# Altium PCB powermodule.PcbDoc
Units mm, origin at the board's own origin, x right, y up, seen from the top; angles counter-clockwise.
Board outline 100 x 100 mm, 2 copper layers (Top Layer, Bottom Layer); 59 components, 39 nets, 203 pads, 39 vias.
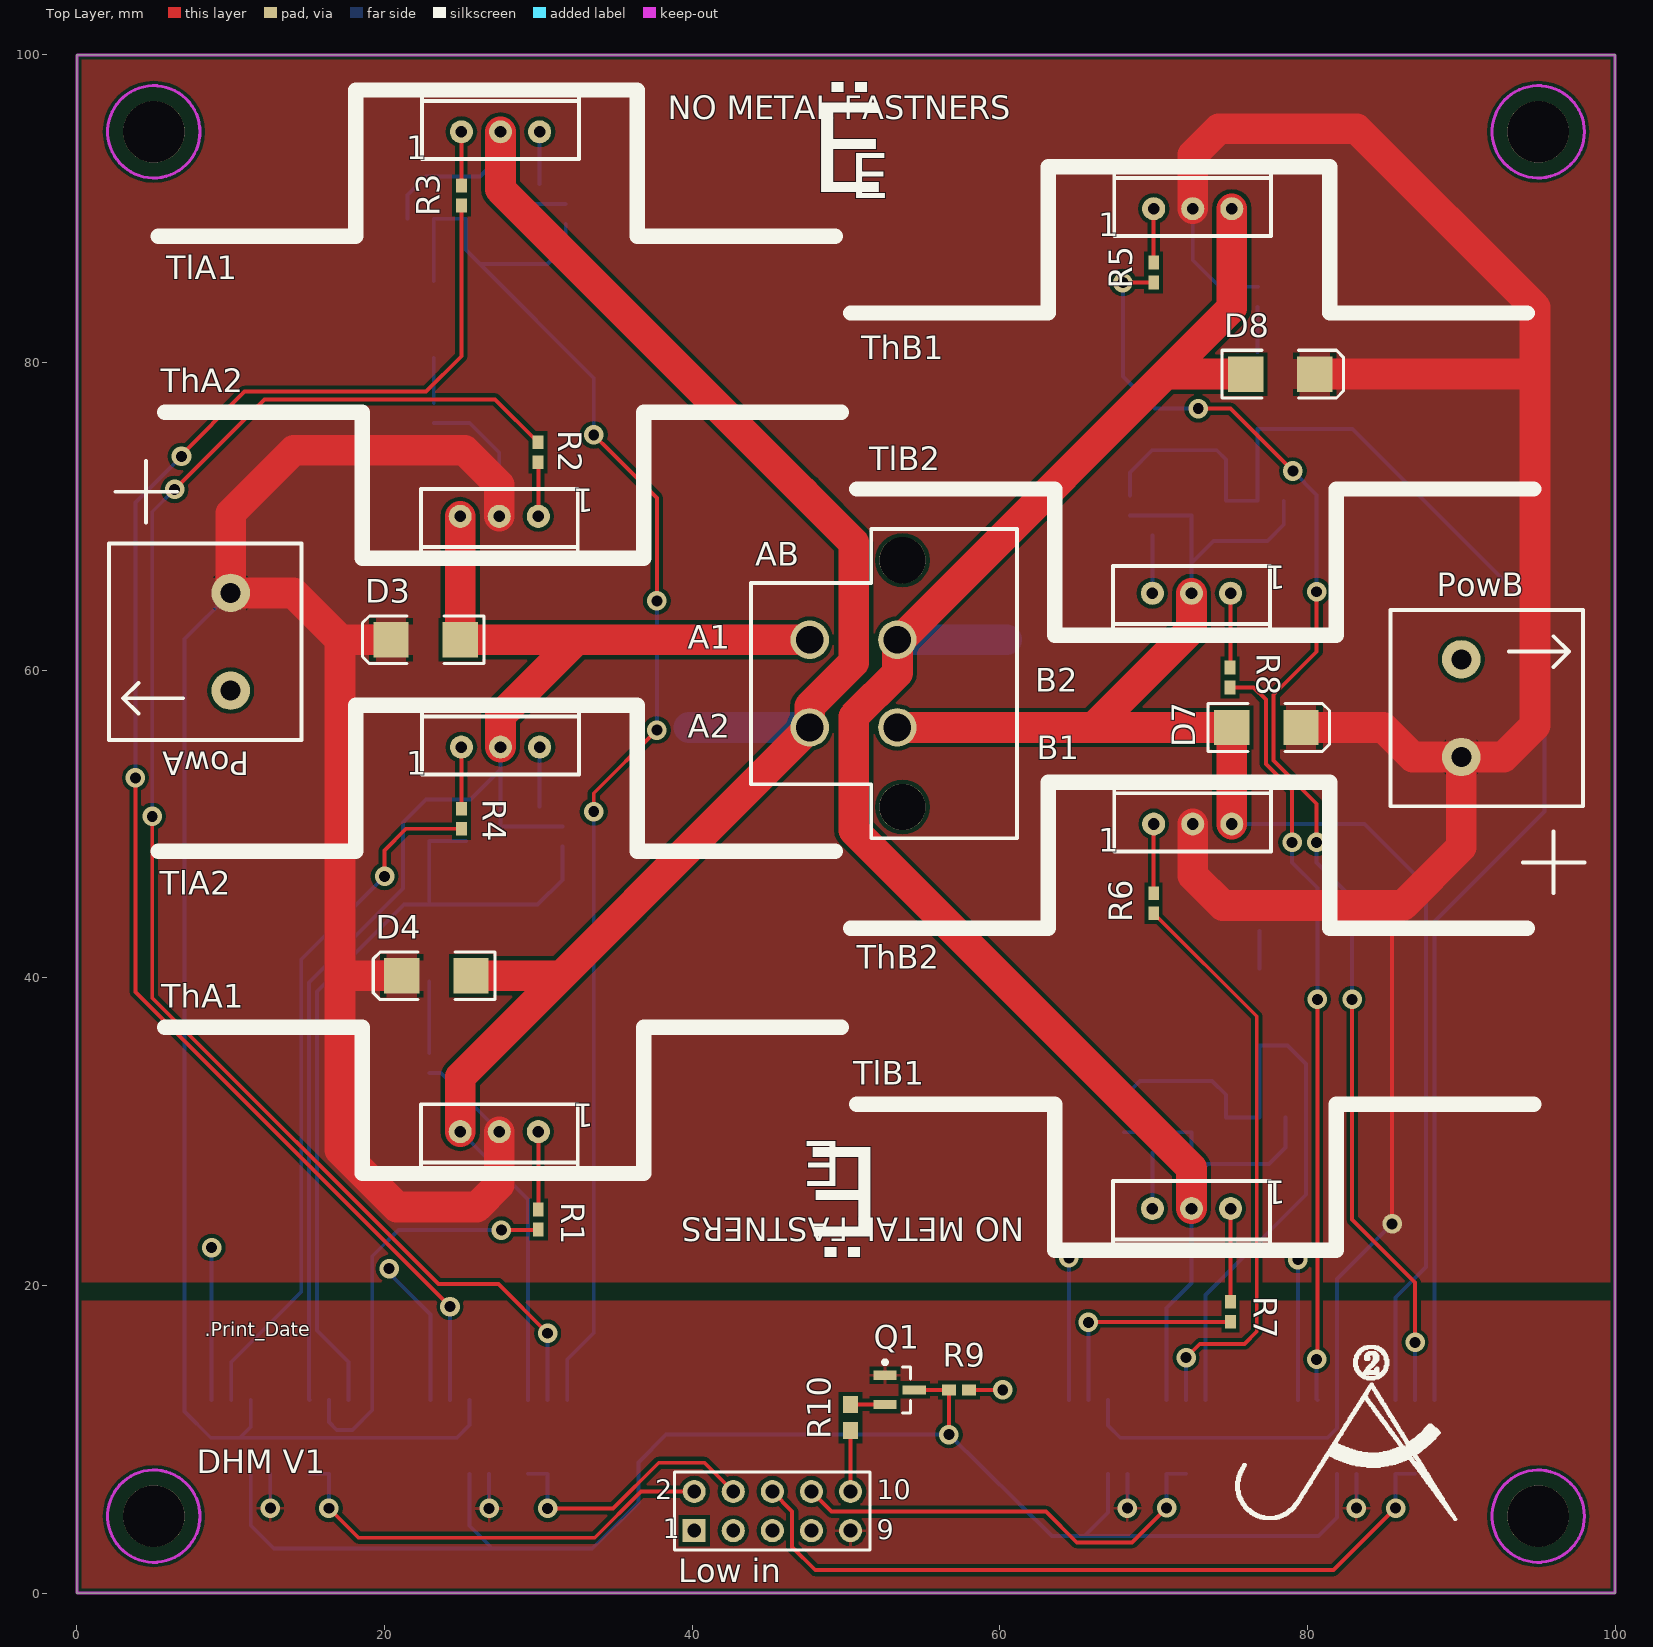
[diagram p0: Top Layer view]
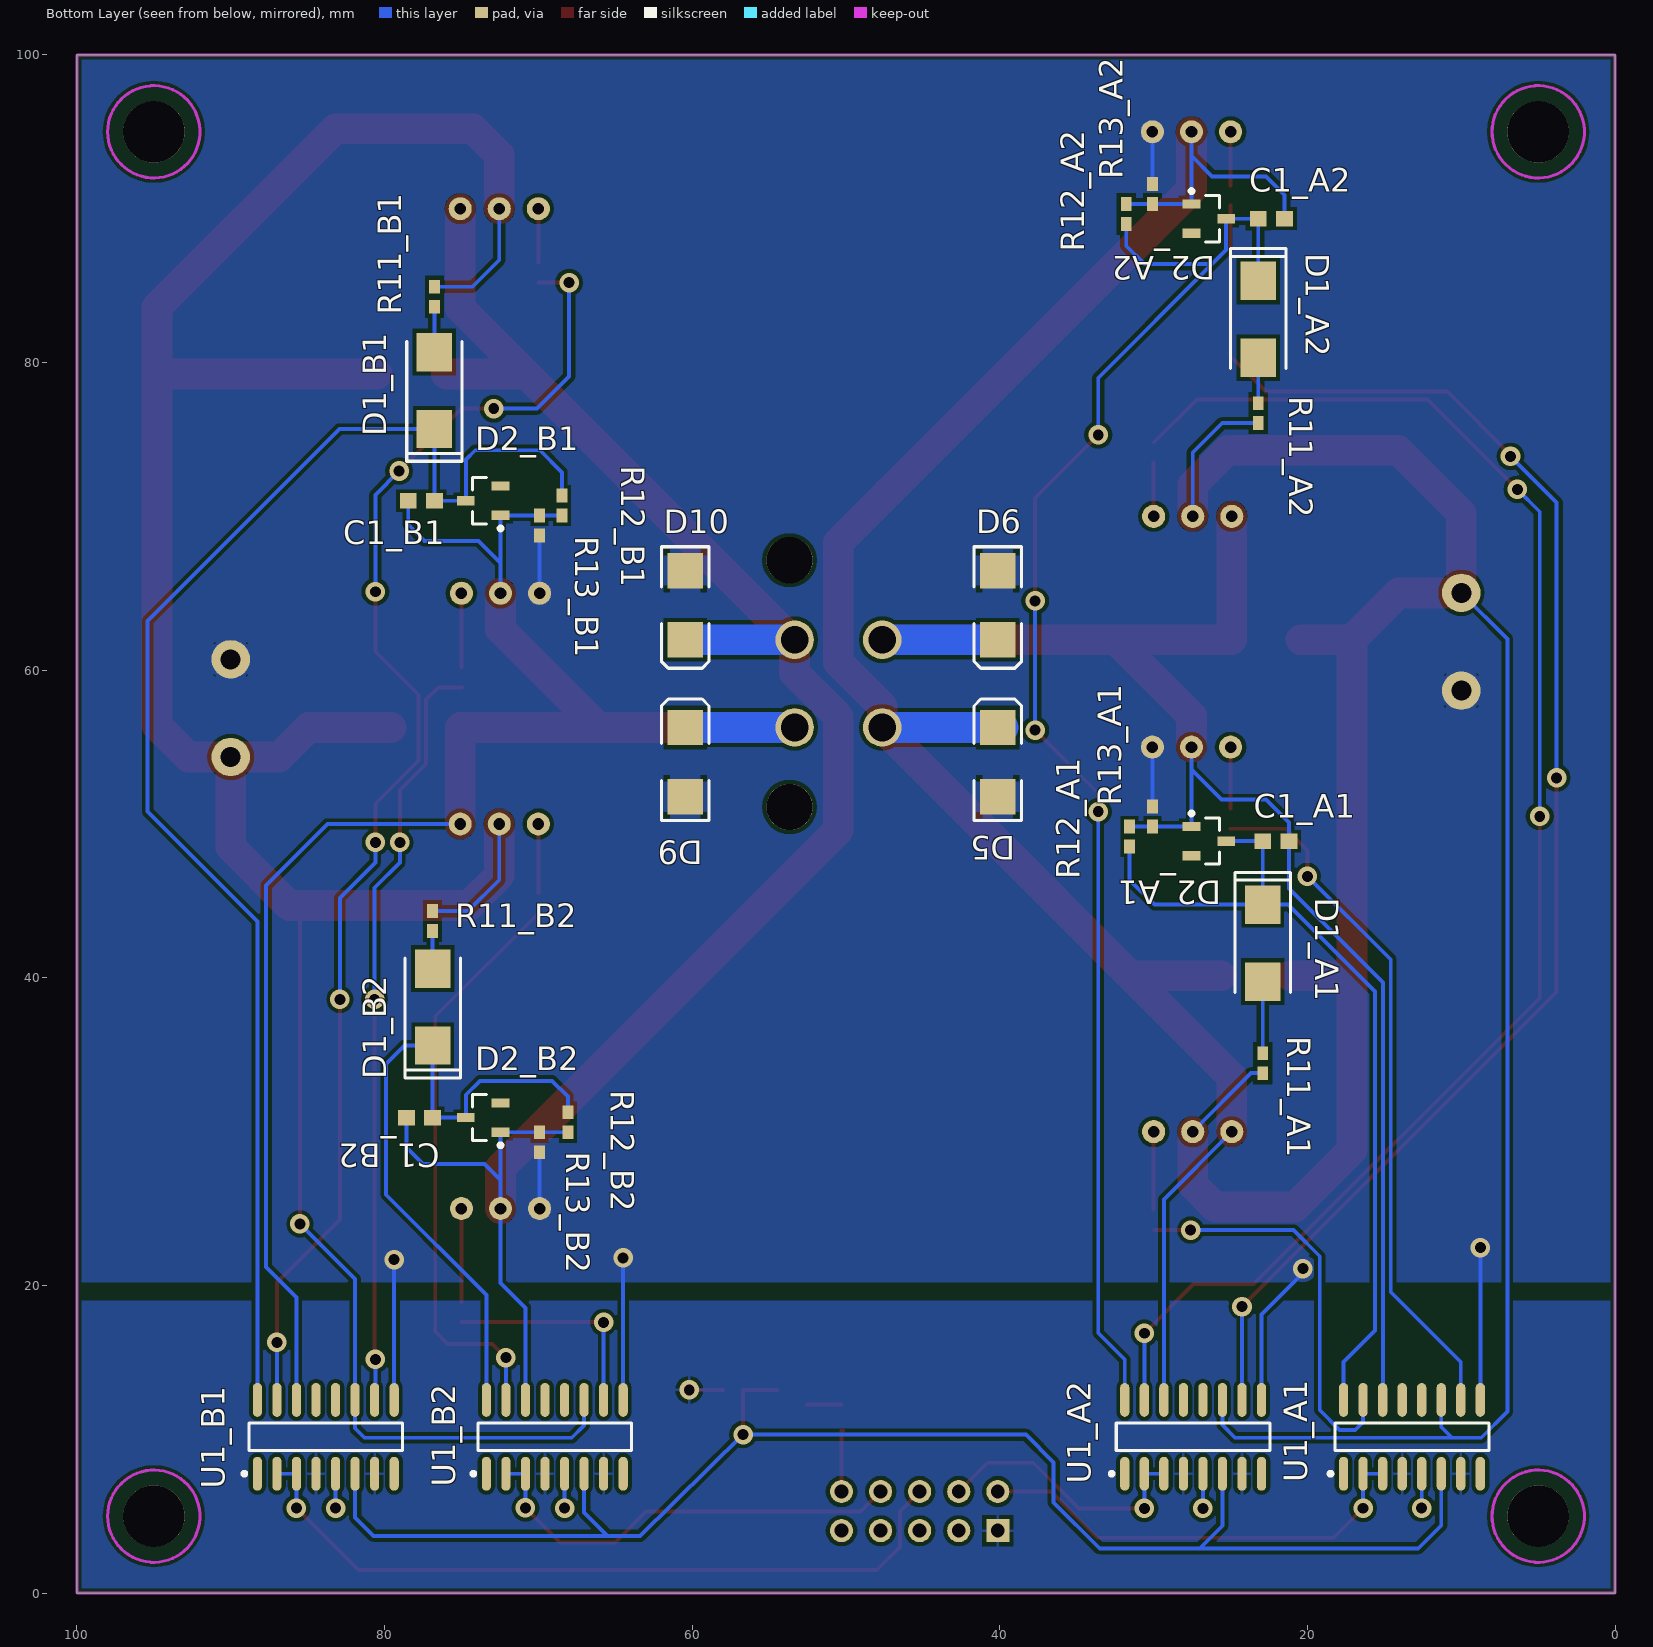
[diagram p1: Bottom Layer view, seen from below]

## Layer stack, top to bottom
Top Layer: signal copper 0.0356
Dielectric: dielectric 0.32, FR-4, Dk 4.8
Bottom Layer: signal copper 0.0356

## Board outline
0,0 0,100 100,100 100,0

## Design rules (kind name [scope] priority, off if disabled: settings)
Clearance "plane pull back" [InPoly vs OnLayer('Keep-out layer')] p1: gap=0.2 // keep polyglons away from edges
Clearance [All] p2: gap=0.254
Height [All] p1: minheight=0 maxheight=100 prefheight=12.7
HoleSize [All] p1: absolutevalues=TRUE maxlimit=4 minlimit=0.025 maxpercent=80.000 minpercent=20.000
MinimumSolderMaskSliver [All] p1: minsoldermaskwidth=0.1
PlaneConnect [InNet('0 HIC')] p1: planeconnectstyle=Relief reliefexpansion=0.508 reliefentries=4 reliefconductorwidth=0.2 reliefairgap=0.2 // for high current ground connects
PolygonConnect PolygonConnectHIC [InNet('0 HIC') OR InNet('12VR_A1')] p1: connectstyle=Relief reliefconductorwidth=2 reliefentries=4 polygonreliefangle="90 Angle"
PolygonConnect [All] p2: connectstyle=Relief reliefconductorwidth=0.2 reliefentries=4 polygonreliefangle="90 Angle"
RoutingVias [All] p1: holewidth=0.7 width=1.2 viastyle="Through Hole" minholewidth=0.25 minwidth=0.6 maxholewidth=0.711 maxwidth=1.2
SilkToSilkClearance [All] p1: silktosilkclearance=0.1
SilkscreenOverComponentPads [All] p1: minsilkscreentomaskgap=0.2
SolderMaskExpansion [All] p1: expansion=0.102
Width [All] p1: maxlimit=5 minlimit=0.17 preferedwidth=0.25
22 further rules are at their usual default settings.

## Classes and differential pairs
channel class PWMswitch: A1 A2 B1 B2
component class powermodule: AB D3 D4 D5 D6 D7 D8 D9 D? "Low in" PA1 PB1 PowA PowB Power1 Q1 R1 R2 R3 R4 R5 R6 R7 R8 R9 R10 ThA1 ThA2 ThB1 ThB2 TlA1 TlA2 TlB1 TlB2
component class B2: C1_B2 D1_B2 D2_B2 R11_B2 R12_B2 R13_B2 U1_B2
component class B1: C1_B1 D1_B1 D2_B1 R11_B1 R12_B1 R13_B1 U1_B1
component class A2: C1_A2 D1_A2 D2_A2 R11_A2 R12_A2 R13_A2 U1_A2
component class A1: C1_A1 D1_A1 D2_A1 R11_A1 R12_A1 R13_A1 U1_A1

## Components (designator, comment, footprint, x,y, rotation, side; value= is the part's Value field where it differs from the comment)
AB "4pinconmolex" MOLEXmegafit2x2pin 47.64,56.276 r270 top
C1_A1 "330uF" 1608[0603] 22.056,48.886 r180 bottom (schematic designator C1)
C1_A2 "330uF" 1608[0603] 22.352,89.348 r180 bottom (schematic designator C1)
C1_B1 "330uF" 1608[0603] 77.608,71.016 r0 bottom (schematic designator C1)
C1_B2 "330uF" 1608[0603] 77.724,30.912 r0 bottom (schematic designator C1)
D1_A1 "DIODE" SMB 22.906,42.256 r90 bottom (schematic designator D1)
D1_A2 "DIODE" SMB 23.202,82.804 r90 bottom (schematic designator D1)
D1_B1 "DIODE" SMB 76.758,78.18 r270 bottom (schematic designator D1)
D1_B2 "DIODE" SMB 76.874,38.1 r270 bottom (schematic designator D1)
D2_A1 "13V" SOT95P240-3N 26.415,48.886 r180 bottom (schematic designator D2)
D2_A2 "13V" SOT95P240-3N 26.415,89.348 r180 bottom (schematic designator D2)
D2_B1 "13V" SOT95P240-3N 73.585,71.016 r0 bottom (schematic designator D2)
D2_B2 "13V" SOT95P240-3N 73.585,30.912 r0 bottom (schematic designator D2)
D3 "tvs diode" DSO-C2/X2.3 22.67,61.976 r180 top
D4 "tvs diode" DSO-C2/X2.3 23.368,40.132 r180 top
D5 "tvs diode" DSO-C2/X2.3 40.132,54.026 r90 bottom
D6 "tvs diode" DSO-C2/X2.3 40.132,64.226 r270 bottom
D7 "tvs diode" DSO-C2/X2.3 77.33,56.276 r0 top
D8 "tvs diode" DSO-C2/X2.3 78.232,79.248 r0 top
D9 "tvs diode" DSO-C2/X2.3 60.452,54.026 r90 bottom
D10 "tvs diode" DSO-C2/X2.3 60.452,64.226 r270 bottom
"Low in" "Header 5X2" HDR2X5 40.132,4.064 r0 top (schematic designator "Low in1")
PowA "p2hic" pin2pitch6.35mmL 10,58.674 r90 top
PowB "p2hic" pin2pitch6.35mmL 90,60.706 r270 top
Q1 "PN2222A" SOT23-3N 53.486,13.208 r0 top
R1 "15" 1005[0402] 30,24.29 r270 top
R2 "15" 1005[0402] 29.972,74.168 r270 top
R3 "15" 1005[0402] 25,90.85 r270 top
R4 "15" 1005[0402] 25,50.344 r90 top
R5 "15" 1005[0402] 70,85.852 r270 top
R6 "15" 1005[0402] 70,44.85 r90 top
R7 "15" 1005[0402] 75,18.288 r270 top
R8 "15" 1005[0402] 74.972,59.526 r90 top
R9 "10K" 1005[0402] 57.342,13.208 r0 top
R10 "10K" 1608[0603] 50.292,11.408 r90 top
R11_A1 "10" 1005[0402] 22.906,34.45 r90 bottom (schematic designator R11)
R11_A2 "10" 1005[0402] 23.202,76.708 r90 bottom (schematic designator R11)
R11_B1 "10" 1005[0402] 76.758,84.276 r270 bottom (schematic designator R11)
R11_B2 "10" 1005[0402] 76.874,43.688 r270 bottom (schematic designator R11)
R12_A1 "100K" 1005[0402] 31.566,49.186 r270 bottom (schematic designator R12)
R12_A2 "100K" 1005[0402] 31.78,89.648 r270 bottom (schematic designator R12)
R12_B1 "100K" 1005[0402] 68.464,70.716 r90 bottom (schematic designator R12)
R12_B2 "100K" 1005[0402] 68.072,30.612 r90 bottom (schematic designator R12)
R13_A1 "470" 1005[0402] 30.08,50.486 r270 bottom (schematic designator R13)
R13_A2 "470" 1005[0402] 30.08,90.948 r270 bottom (schematic designator R13)
R13_B1 "470" 1005[0402] 69.92,69.416 r90 bottom (schematic designator R13)
R13_B2 "470" 1005[0402] 69.92,29.312 r90 bottom (schematic designator R13)
ThA1 "STM nmos transistor" "T0220 heatsinked" 30,30 r180 top
ThA2 "STM nmos transistor" "T0220 heatsinked" 30,70 r180 top
ThB1 "STM nmos transistor" "T0220 heatsinked" 70,90 r0 top
ThB2 "STM nmos transistor" "T0220 heatsinked" 70,50 r0 top
TlA1 "STM nmos transistor" "T0220 heatsinked" 25,95 r0 top
TlA2 "STM nmos transistor" "T0220 heatsinked" 25,55 r0 top
TlB1 "STM nmos transistor" "T0220 heatsinked" 75,25 r180 top
TlB2 "STM nmos transistor" "T0220 heatsinked" 75,65 r180 top
U1_A1 "ADuM7234" SOIC127P600-16N 13.208,10.16 r90 bottom (schematic designator U1)
U1_A2 "ADuM7234" SOIC127P600-16N 27.432,10.16 r90 bottom (schematic designator U1)
U1_B1 "ADuM7234" SOIC127P600-16N 83.82,10.16 r90 bottom (schematic designator U1)
U1_B2 "ADuM7234" SOIC127P600-16N 68.932,10.16 r90 bottom (schematic designator U1)

## Footprints (in the part's own frame and the unit in brackets; to place one, negate y for a bottom-side part, rotate by r counter-clockwise, add the part's x,y. Pads: shape width x height; smd on the part's side, far side on the other; paste and mask are expansions set on the pad)
1005[0402] [mm] "Chip Resistor; Body 1.1 x 0.5 mm (LxW typ)"
  rect 0.9x0.7 smd: 1(-0.65,0) 2(0.65,0)
1608[0603] [mm] "Chip Capacitor; Body 1.6 x 0.8 mm (LxW typ)"
  rect 1.1x1 smd: 1(-0.85,0) 2(0.85,0)
DSO-C2/X2.3 [mm] "DO-214-AA/SMB; 2 C-Bend Leads; Body 5.3 x 3.6 mm, inc. leads (LxW)"
  rect 2.3x2.3 smd: 1(-2.25,0) 2(2.25,0)
  silkscreen extent -3.8,-1.55 4.1,1.55
HDR2X5 [mm] "Connector; Header; 5x2 Position"
  rect 1.5x1.5 hole 0.9: 1(0,0)
  round 1.5 hole 0.9: 2(0,2.54) 3(2.54,0) 4(2.54,2.54) 5(5.08,0) 6(5.08,2.54) 7(7.62,0) 8(7.62,2.54) 9(10.16,0) 10(10.16,2.54)
  silkscreen extent -1.27,-1.27 11.43,3.81
MOLEXmegafit2x2pin [mm]
  round 2.5 hole 1.8: 1(0,0) 2(-5.7,0) 3(-5.7,5.7) 4(0,5.7)
  round 3 hole 3 unplated: 5(-10.87,6.03) 5(5.17,6.03)
  silkscreen extent -12.9,-3.81 7.2,13.47, body extent -12.35,-3.2 6.75,10.83, height 16.93
pin2pitch6.35mmL [mm] "6.35mm pitch screw terminal hi current"
  round 2.5 hole 1.3: 1(6.35,0) 2(0,0)
  silkscreen extent -3.2,-4.6 9.55,7.9, body extent -3.17,-4.6 10.1,7.9, height 21.5
SMB [mm]
  rect 2.5x2.3 smd: A(-2.5,0) K(2.5,0)
  silkscreen extent -3.2,-1.8 4.6,1.8
SOIC127P600-16N [mm] "SOIC, 16-Leads, Body 9.9x3.9mm, Pitch 1.27mm, IPC Medium Density"
  oval 2.2x0.6 smd: 1(-2.4,4.445) 2(-2.4,3.175) 3(-2.4,1.905) 4(-2.4,0.635) 5(-2.4,-0.635) 6(-2.4,-1.905) 7(-2.4,-3.175) 8(-2.4,-4.445) 9(2.4,-4.445) 10(2.4,-3.175) 11(2.4,-1.905) 12(2.4,-0.635) 13(2.4,0.635) 14(2.4,1.905) 15(2.4,3.175) 16(2.4,4.445)
  silkscreen extent -2.52,-5 0.9,5.42, body extent -2,-5 2,5, height 1.91
SOT23-3N [mm] "SOT23, 3-Leads, Body 2.9x1.3mm, Pitch 0.95mm, Lead Span 2.5mm, IPC Medium Density"
  rect 1.5x0.6 smd: 1(-0.95,0.95) 2(-0.95,-0.95) 3(0.95,0)
  silkscreen extent -1.07,-1.5 0.7,1.92, body extent -0.7,-1.5 0.7,1.5, height 1.1
SOT95P240-3N [mm] "SOT23, 3-Leads, Body 2.9x1.3mm, Pitch 0.95mm, Lead Span 2.4mm, IPC Medium Density"
  rect 1.15x0.6 smd: 1(-1.125,0.95) 2(-1.125,-0.95) 3(1.125,0)
  silkscreen extent -1.25,-1.5 0.7,1.92, body extent -0.7,-1.5 0.7,1.5, height 1.14
"T0220 heatsinked" [mm] "TO22O with wakefield 657-20ABP heatsink"
  round 1.5 hole 0.75: 1(0,0) 2(2.54,0) 3(5.08,0)
  silkscreen extent -19.71,-6.78 24.29,2.72, body extent -2.6,-1.8 7.6,2.7, height 7.82

## Part data
C1_A1 C1_A2 C1_B1 C1_B2: library part Cap_pol_mm, "Capacitor polorized"
D1_A1 D1_A2 D1_B1 D1_B2: "regular diode"
D2_A1 D2_A2 D2_B1 D2_B2: library part "zennerdiode sot23", "Zener"
D3 D4 D5 D6 D7 D8 D9 D10: library part tvsdiode, "tvs diode fast 100A 160V"
"Low in": "Header, 5-Pin, Dual row"
PowA PowB: "2 terminal 5mm pitch screw terminal"
Q1: "NPN General Purpose Amplifier"
R1 R2 R3 R4 R5 R6 R7 R8 R9 R10 R11_A1 R11_A2 R11_B1 R11_B2 R12_A1 R12_A2 R12_B1 R12_B2 R13_A1 R13_A2 R13_B1 R13_B2: library part Res_mm, "Resistor"
ThA1 ThA2 ThB1 ThB2 TlA1 TlA2 TlB1 TlB2: "MOSFET N-CH 600V 0.078Ohm typ. 34A MDmesh II"
U1_A1 U1_A2 U1_B1 U1_B2: "ADuM7234 dual isolated gate driver"

## Free pads (board coordinates)
  round 4 hole 4 unplated: 0(5,5) 0(5,95) 0(95,5) 0(95,95)

## Via types
v1: diameter 1.27, hole 0.711, Top Layer to Bottom Layer, 39 vias

## Nets (pads, with @x,y where several pads share a name; then routed paths per layer and width w, separated by ;. In a path a pad name is that pad's centre, name@x,y a point inside that pad or via, vN(x,y) a via of type N, cw(c..) or ccw(c..) an arc to the next point about the centre after c; other vN are vias at no path point)
"0 HIC": D5.1 D6.1 D9.1 D10.1 PowA.2 PowB.2 R13_A1.1 R13_A2.1 R13_B1.1 R13_B2.1 TlA1.3 TlA2.3 TlB1.3 TlB2.3 U1_A1.9 U1_A2.9 U1_B1.9 U1_B2.9 | length 52.6
  Bottom Layer w0.254: U1_A1.9 v1(8.763,22.463) ; v1(20.3,21.1) 20.3,20.8 22.987,18.113 U1_A2.9 ; R13_A1.1 TlA2.3 ; R13_A2.1 TlA1.3 ; U1_B2.9 v1(64.487,21.787) ; TlB1.3 R13_B2.1 ; TlB2.3 R13_B1.1 ; U1_B1.9 v1(79.375,21.675)
0_A1: "Low in.9" Q1.1 U1_A1.5 U1_A2.5 U1_B1.5 U1_B2.5 | length 9
  Bottom Layer w0.254: v1(12.573,5.527) U1_A1.5 ; v1(26.797,5.503) U1_A2.5 ; v1(68.297,5.527) U1_B2.5 ; v1(83.185,5.527) U1_B1.5
5VR_A1: "Low in.1" R9.2 U1_A1.4 U1_A1.7 U1_A2.4 U1_A2.7 U1_B1.4 U1_B1.7 U1_B2.4 U1_B2.7 | length 2.2
  Top Layer w0.254: R9.2 v1(60.192,13.208)
12VF_A1: C1_A1.1 D1_A1.K D2_A1.3 R12_A1.2 U1_A1.16 | length 55.1
  Bottom Layer w0.254: U1_A1.16 17.653,15.029 15.6,17.082 15.6,39.1 21.256,44.756 D1_A1.K ; D2_A1.3 C1_A1.1 D1_A1.K ; R12_A1.2 31.566,46.366 29.956,44.756 D1_A1.K
12VF_A2: C1_A2.1 D1_A2.K D2_A2.3 R12_A2.2 U1_A2.16 | length 98
  Top Layer w0.254: v1(33.6,50.8) 33.6,52 v1(37.7,56.1) ; v1(33.6,75.3) 34.65,74.25 37.7,71.2 v1(37.7,64.5)
  Bottom Layer w0.254: D1_A2.K C1_A2.1 D2_A2.3 25.29,87.31 26.2,86.4 ; R12_A2.2 31.78,87.58 30.6,86.4 26.2,86.4 ; U1_A2.16 31.877,15.177 33.6,16.9 v1(33.6,50.8) ; v1(33.6,75.3) 33.6,79 26.2,86.4 ; v1(37.7,56.1) v1(37.7,64.5)
12VF_B1: C1_B1.1 D1_B1.K D2_B1.3 R12_B1.2 U1_B1.16 | length 95.4
  Bottom Layer w0.254: R12_B1.2 68.464,72.864 69.9,74.3 74.1,74.3 74.71,73.69 D2_B1.3 C1_B1.1 D1_B1.K 82.92,75.68 95.4,63.2 95.4,50.8 88.265,43.665 U1_B1.16
12VF_B2: C1_B2.1 D1_B2.K D2_B2.3 R12_B2.2 U1_B2.16 | length 44.8
  Bottom Layer w0.254: R12_B2.2 68.072,32.272 69.1,33.3 73.8,33.3 74.7,32.4 74.7,30.922 D2_B2.3 C1_B2.1 D1_B2.K 78.7,35.6 79.9,34.4 79.9,25.9 73.377,19.377 U1_B2.16
12VR_A1: D3.2 D4.2 D7.2 D8.2 PowA.1 PowB.1 R11_A1.1 R11_A2.1 R11_B1.1 R11_B2.1 ThA1.2 ThA2.2 ThB1.2 ThB2.2 U1_A1.11 U1_A2.11 U1_B1.11 U1_B2.11 | length 373.4
  Top Layer w0.254: v1(85.5,24) 85.5,44
  Top Layer w2: 17.124,61.976 D3.2 ; 17.168,40.132 D4.2 ; ThA1.2 27.46,26.56 26,25.1 20.8,25.1 17.1,28.8 17.1,62 14.076,65.024 PowA.1 10,70.2 14.1,74.3 25.2,74.3 27.46,72.04 ThA2.2 ; ThB2.2 72.54,46.66 74.5,44.7 86.2,44.7 90,48.5 PowB.1 ; ThB1.2 72.54,93.49 74.25,95.2 83.2,95.2 94.8,83.6 94.8,56.4 92.756,54.356 PowB.1 ; D7.2 84.924,56.276 86.844,54.356 PowB.1 ; D8.2 94.652,79.248
  Bottom Layer w0.254: PowA.1 7,62.024 7,11.8 8.7,10.1 10.6,10.1 ; U1_A1.11 11.303,10.803 10.6,10.1 ; R11_A1.1 23.66,33.8 ThA1.2 ; R11_A2.1 25.542,76.058 27.46,74.14 ThA2.2 ; U1_A2.11 25.527,10.927 24.7,10.1 10.6,10.1 ; U1_B2.11 67.027,10.9 67.827,10.1 81.3,10.1 81.915,10.715 U1_B1.11 81.915,20.415 v1(85.5,24) ; ThB2.2 72.54,46.36 74.562,44.338 R11_B2.1 ; ThB1.2 72.54,86.66 74.274,84.926 R11_B1.1@76.8,84.926
"A1 PWM": "Low in.2" U1_A1.2 U1_A1.3 | length 29.3
  Top Layer w0.254: v1(16.383,5.517) 18.3,3.6 33.666,3.6 36.67,6.604 40.132,6.604
  Bottom Layer w0.254: U1_A1.3 U1_A1.2 v1(16.383,5.517)
"A2 PWM": "Low in.4" U1_A2.2 U1_A2.3 | length 17.6
  Top Layer w0.254: v1(30.607,5.507) 34.855,5.507 37.824,8.476 40.8,8.476 42.672,6.604
  Bottom Layer w0.254: U1_A2.3 U1_A2.2 v1(30.607,5.507)
"B1 PWM": "Low in.6" U1_B1.2 U1_B1.3 | length 49.2
  Top Layer w0.254: 45.212,6.604 46.5,5.316 46.5,3 48,1.5 81.7,1.5 v1(85.725,5.525)
  Bottom Layer w0.254: v1(85.725,5.525) U1_B1.3 U1_B1.2
"B2 PWM": "Low in.8" U1_B2.2 U1_B2.3 | length 28.9
  Top Layer w0.254: 47.752,6.604 49.056,5.3 63,5.3 65,3.3 68.6,3.3 v1(70.837,5.537)
  Bottom Layer w0.254: v1(70.837,5.537) U1_B2.3 U1_B2.2
DISABLE: Q1.3 R9.1 U1_A1.6 U1_A2.6 U1_B1.6 U1_B2.6 | length 100.5
  Top Layer w0.254: Q1.3 R9.1 v1(56.692,10.308)
  Bottom Layer w0.254: U1_A1.6 11.303,4.403 12.8,2.906 27,2.906 ; U1_A2.6 25.527,4.379 27,2.906 ; 48.992,10.3 38.3,10.3 36.5,8.5 36.5,5.9 33.506,2.906 27,2.906 ; 48.998,10.302 v1(56.692,10.308) 63.385,3.715 65.5,3.715 ; U1_B2.6 67.027,5.242 65.5,3.715 ; U1_B1.6 81.915,4.915 80.715,3.715 65.5,3.715
ENABLE: "Low in.10" R10.1 | length 4
  Top Layer w0.254: R10.1@50.206,10.558 R10.1 ; 50.292,6.604 R10.1@50.292,10.472
FLOATINGREF_A1: AB.2 C1_A1.2 D2_A1.1 D3.1 D6.2 R12_A1.1 R13_A1.2 ThA2.3 TlA2.2 U1_A1.14 | length 104.2
  Top Layer w2: D3.1 AB.2 ; D3.1@24.92,62.06 ThA2.3 ; TlA2.2 27.54,57.04 32.476,61.976
  Bottom Layer w0.254: U1_A1.14 15.092,12.581 15.092,39.692 21.206,45.806 C1_A1.2 21.206,50.094 22.7,51.588 25.588,51.588 27.5,53.5 ; TlA2.2 D2_A1.1 R13_A1.2 R12_A1.1
  Bottom Layer w2: D6.2 AB.2
FLOATINGREF_A2: AB.1 C1_A2.2 D2_A2.1 D4.1 D5.2 R12_A2.1 R13_A2.2 ThA1.3 TlA1.2 U1_A2.14 | length 135.7
  Top Layer w2: ThA1.3 24.92,33.556 AB.1 47.64,57.64 50.5,60.5 50.5,68.3 47.244,71.556 ; D4.1 31.46,40.132 ; TlA1.2 27.54,91.26 47.244,71.556 ; 47.244,71.6 47.244,71.556
  Bottom Layer w0.254: C1_A2.2 21.502,90.902 22.7,92.1 26.2,92.1 27.54,93.44 ; ThA1.3 29.337,25.583 U1_A2.14 ; TlA1.2 27.54,93.44 ; R12_A2.1 R13_A2.2 D2_A2.1 27.54,93.44
  Bottom Layer w2: D5.2@39.802,56.276 AB.1
FLOATINGREF_B1: AB.4 C1_B1.2 D2_B1.1 D7.1 D9.2 R12_B1.1 R13_B1.2 ThB2.3 TlB2.2 U1_B1.14 | length 112.7
  Top Layer w2: AB.4 66.076,56.276 ; TlB2.2 72.46,62.66 66.076,56.276 ; ThB2.3 D7.1 66.076,56.276
  Bottom Layer w0.254: R12_B1.1 R13_B1.2 D2_B1.1 72.46,66.96 ; TlB2.2 72.46,66.96 ; ThB2.3 83.7,50 87.7,46 87.7,21.2 85.725,19.225 U1_B1.14 ; C1_B1.2 78.458,69.458 77.4,68.4 73.9,68.4 72.46,66.96
  Bottom Layer w2: AB.4 D9.2
FLOATINGREF_B2: AB.3 C1_B2.2 D2_B2.1 D8.1 D10.2 R12_B2.1 R13_B2.2 ThB1.3 TlB1.2 U1_B2.14 | length 128.1
  Top Layer w2: AB.3@53.34,61.8 75.08,83.54 ThB1.3 ; AB.3 53.34,59.817 50.5,56.977 50.5,49.6 72.46,27.64 TlB1.2 ; 70.803,79.248 D8.1
  Bottom Layer w0.254: R12_B2.1 R13_B2.2 D2_B2.1 72.46,26.86 ; U1_B2.14 70.837,18.537 72.46,20.16 TlB1.2 72.46,26.86 ; C1_B2.2 78.574,28.974 77.5,27.9 73.5,27.9 72.46,26.86
  Bottom Layer w2: AB.3 D10.2
NetD1_A1_A: D1_A1.A R11_A1.2 | length 4.7
  Bottom Layer w0.254: R11_A1.2 D1_A1.A
NetD1_A2_A: D1_A2.A R11_A2.2 | length 2.9
  Bottom Layer w0.254: R11_A2.2 D1_A2.A
NetD1_B1_A: D1_B1.A R11_B1.2 | length 2.9
  Bottom Layer w0.254: D1_B1.A R11_B1.2
NetD1_B2_A: D1_B2.A R11_B2.2 | length 2.4
  Bottom Layer w0.254: D1_B2.A R11_B2.2
NetQ1_2: Q1.2 R10.2 | length 2.2
  Top Layer w0.254: R10.2 Q1.2
NetR1_1: R1.1 ThA1.1 | length 5.1
  Top Layer w0.254: R1.1 ThA1.1
NetR1_2: R1.2 U1_A1.15 | length 26.5
  Top Layer w0.254: v1(27.6,23.6) R1.2@29.96,23.6
  Bottom Layer w0.254: U1_A1.15 16.383,11.117 16.892,10.608 17.908,10.608 19.2,11.9 19.2,21.9 20.9,23.6 v1(27.6,23.6)
NetR2_1: R2.1 U1_A2.15 | length 99.9
  Top Layer w0.254: v1(4.9,50.5) 4.9,38.7 23.5,20.1 27.4,20.1 v1(30.607,16.893) ; v1(6.35,71.75) 12.2,77.6 27.19,77.6 R2.1
  Bottom Layer w0.254: v1(4.9,50.5) 4.9,70.3 v1(6.35,71.75) ; U1_A2.15 v1(30.607,16.893)
NetR2_2: R2.2 ThA2.1 | length 3.5
  Top Layer w0.254: ThA2.1 R2.2@30,73.49
NetR3_1: R3.1 TlA1.1 | length 3.5
  Top Layer w0.254: R3.1 TlA1.1
NetR3_2: R3.2 U1_A2.10 | length 101.9
  Top Layer w0.254: v1(3.8,53) 3.8,39.082 v1(24.257,18.625) ; v1(6.8,73.9) 6.7,73.9 10.908,78.108 22.7,78.108 25,80.408 R3.2
  Bottom Layer w0.254: v1(3.8,53) 3.8,70.9 v1(6.8,73.9) ; U1_A2.10 v1(24.257,18.625)
NetR4_1: R4.1 U1_A1.10 | length 45.4
  Top Layer w0.254: v1(20,46.6) 20,48.288 21.406,49.694 R4.1
  Bottom Layer w0.254: U1_A1.10 10.033,15.033 14.584,19.584 14.584,41.184 v1(20,46.6)
NetR4_2: R4.2 TlA2.1 | length 4
  Top Layer w0.254: R4.2 TlA2.1
NetR5_1: R5.1 ThB1.1 | length 3.5
  Top Layer w0.254: R5.1 ThB1.1
NetR5_2: R5.2 U1_B1.15 | length 87.7
  Top Layer w0.254: v1(68,85.2) R5.2@69.998,85.2 ; v1(72.9,77) 75,77 v1(79.051,72.949) ; v1(80.6,48.8) 80.6,51.319 77.8,54.118 77.8,58.4 80.6,61.2 v1(80.6,65.1) ; v1(82.9,38.6) 82.9,24.3 86.995,20.205 v1(86.995,16.3)
  Bottom Layer w0.254: v1(68,85.2) 68,79.1 70.1,77 v1(72.9,77) ; v1(79.051,72.949) 80.6,71.4 v1(80.6,65.1) ; v1(80.6,48.8) 80.6,47.5 82.9,45.2 v1(82.9,38.6) ; U1_B1.15 v1(86.995,16.3)
NetR6_1: R6.1 U1_B2.15 | length 38
  Top Layer w0.254: R6.1 76.7,37.5 76.7,17 75.9,16.2 73,16.2 v1(72.107,15.307)
  Bottom Layer w0.254: U1_B2.15 v1(72.107,15.307)
NetR6_2: R6.2 ThB2.1 | length 4.5
  Top Layer w0.254: R6.2 ThB2.1
NetR7_1: R7.1 TlB1.1 | length 6.1
  Top Layer w0.254: R7.1 TlB1.1
NetR7_2: R7.2 U1_B2.10 | length 14.1
  Top Layer w0.254: v1@66,17.6 66.038,17.638 R7.2
  Bottom Layer w0.254: U1_B2.10 v1(65.757,17.6)
NetR8_1: R8.1 U1_B1.10 | length 49.6
  Top Layer w0.254: R8.1 76.5,58.876 77.292,58.084 77.292,53.908 79,52.2 v1(79,48.8) ; v1(80.6,15.2) 80.645,15.245 v1(80.645,38.6)
  Bottom Layer w0.254: v1(79,48.8) 79,47.5 80.645,45.855 v1(80.645,38.6) ; v1(80.6,15.2) 80.6,12.605 U1_B1.10
NetR8_2: R8.2 TlB2.1 | length 4.8
  Top Layer w0.254: R8.2@75,60.176 TlB2.1
pads on no net: "Low in.3" "Low in.5" "Low in.7" AB.5 D2_A1.2 D2_A2.2 D2_B1.2 D2_B2.2 U1_A1.1 U1_A1.8 U1_A1.12 U1_A1.13 U1_A2.1 U1_A2.8 U1_A2.12 U1_A2.13 U1_B1.1 U1_B1.8 U1_B1.12 U1_B1.13 U1_B2.1 U1_B2.8 U1_B2.12 U1_B2.13

## Polygon pours and split planes (outlines as drawn)
"0 HIC" on Bottom Layer "HIC return" (solid, remove dead copper, pour order 1001): 0,20.2 100,20.2 100,100 0,100
5VR_A1 on Bottom Layer "Top Layer-No Net" (solid, remove dead copper, pour order 1000): 100,19 0,19 0,0 100,0
12VR_A1 on Top Layer "Top Layer-No Net" (solid, remove dead copper, pour order 1003): 0.3,20.2 99.7,20.2 99.7,99.7 0.3,99.7
0_A1 on Top Layer "Top Layer-No Net" (solid, remove dead copper, pour order 1002): 100,19 0,19 0,0 100,0

## Keep-outs
Keep-Out Layer:
  circle w0.2: c95,95 r3
  circle w0.2: c5,95 r3
  circle w0.2: c5,5 r3
  circle w0.2: c95,5 r3
  lines w0.2: 0,0 100,0 100,100 0,100 0,0

## Silkscreen, mask and mechanical layers (free items; w line width, h text height)
Top Overlay:
  drawing of 697 lines, arcs and shapes, not listed
  text "NO METAL FASTNERS" at 38.4,95.8 h1.52
  text "E" at 50.261,89.7 h5
  text "Ë" at 47.625,89.2 h10
  text "A1" at 39.7,61.4 h1.52
  text "B2" at 62.3,58.6 h1.52
  text "A2" at 39.7,55.6 h1.52
  text "B1" at 62.4,54.2 h1.52
  text "Ë" at 52.375,30.863 h10 r180
  text "E" at 49.739,30.363 h5 r180
  text "NO METAL FASTNERS" at 61.6,24.4 h1.52 r180
  text ".Print_Date" at 8.3,16.4 h1.52
  text "DHM V1" at 7.8,7.8 h1.52

## Text inside footprints (layer, text, board x,y; h text height)
"Low in": Top Overlay "10" at 52,6.1 h1.27; Top Overlay "9" at 52,3.5 h1.27; Top Overlay "1" at 38.1,3.556 h1.27; Top Overlay "2" at 37.592,6.096 h1.27
ThA1: Top Overlay "1" at 33.6,31.8 h1.52 r180
ThA2: Top Overlay "1" at 33.6,71.8 h1.52 r180
ThB1: Top Overlay "1" at 66.4,88.2 h1.52
ThB2: Top Overlay "1" at 66.4,48.2 h1.52
TlA1: Top Overlay "1" at 21.4,93.2 h1.52
TlA2: Top Overlay "1" at 21.4,53.2 h1.52
TlB1: Top Overlay "1" at 78.6,26.8 h1.52 r180
TlB2: Top Overlay "1" at 78.6,66.8 h1.52 r180